# Altium PCB Transmitter.PcbDoc
Units mm, origin at the board's own origin, x right, y up, seen from the top; angles counter-clockwise.
Board outline 127.5 x 62.25 mm, 2 copper layers (Top Layer, Bottom Layer); 19 components, 30 nets, 93 pads, 4 vias.
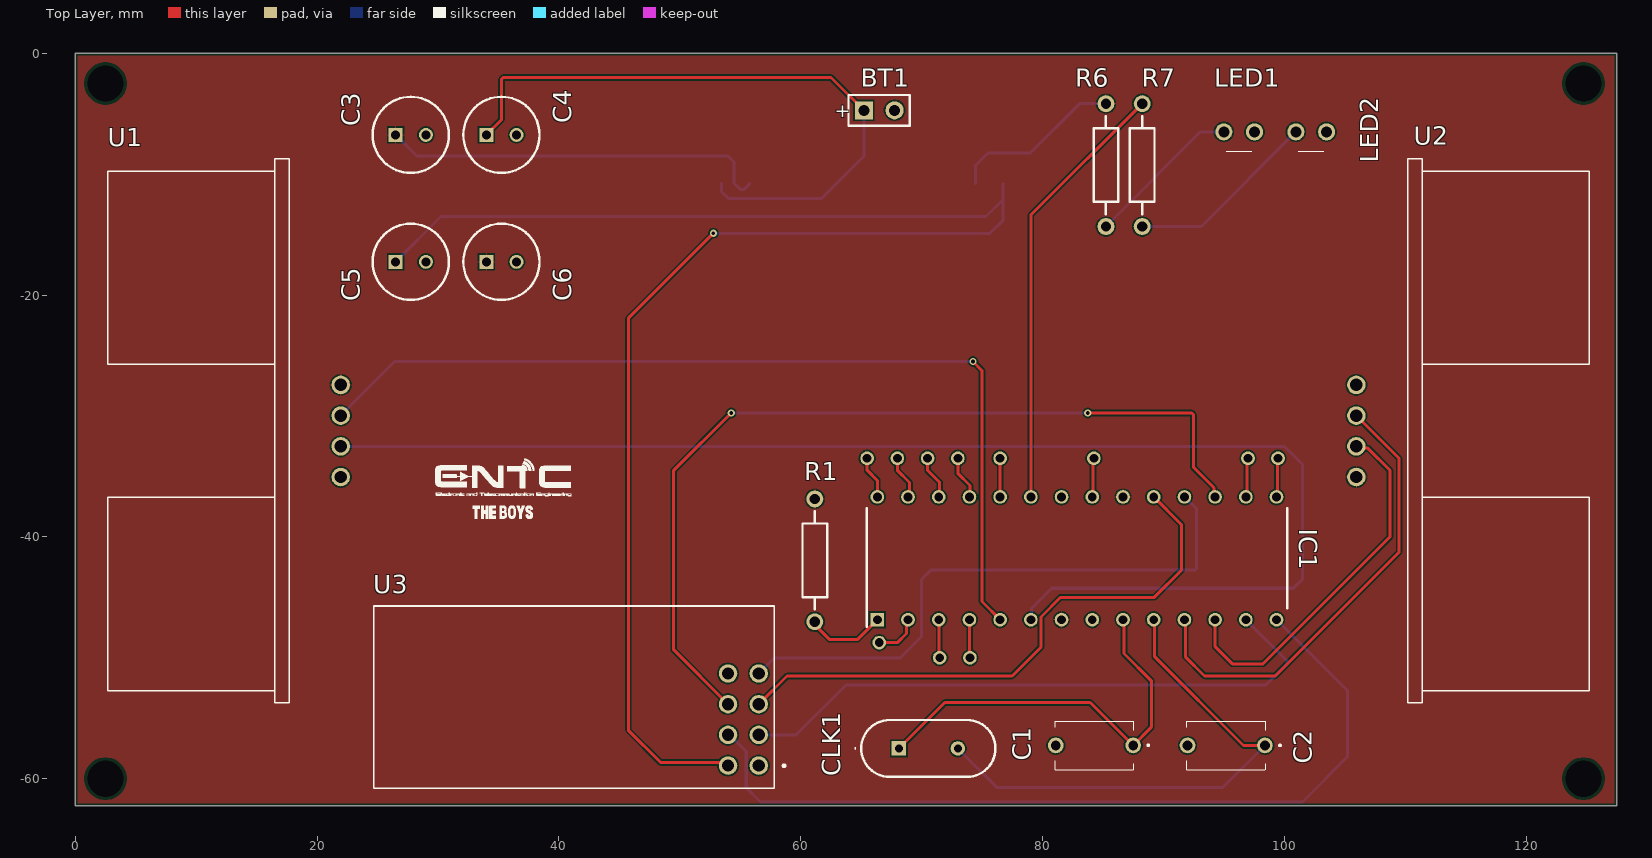
[diagram p0: Top Layer view]
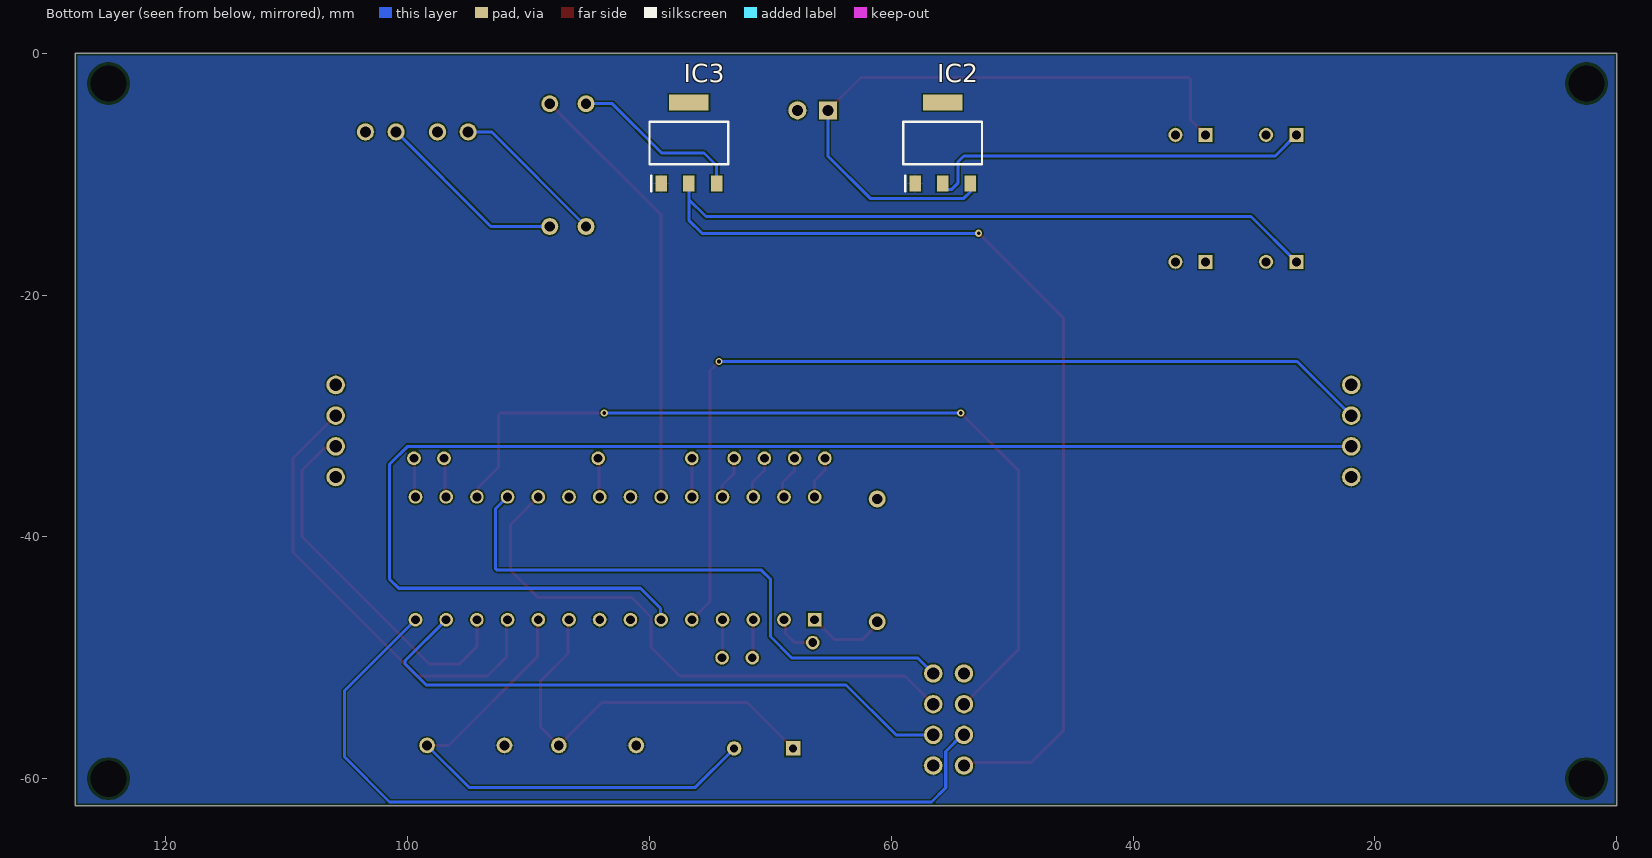
[diagram p1: Bottom Layer view, seen from below]
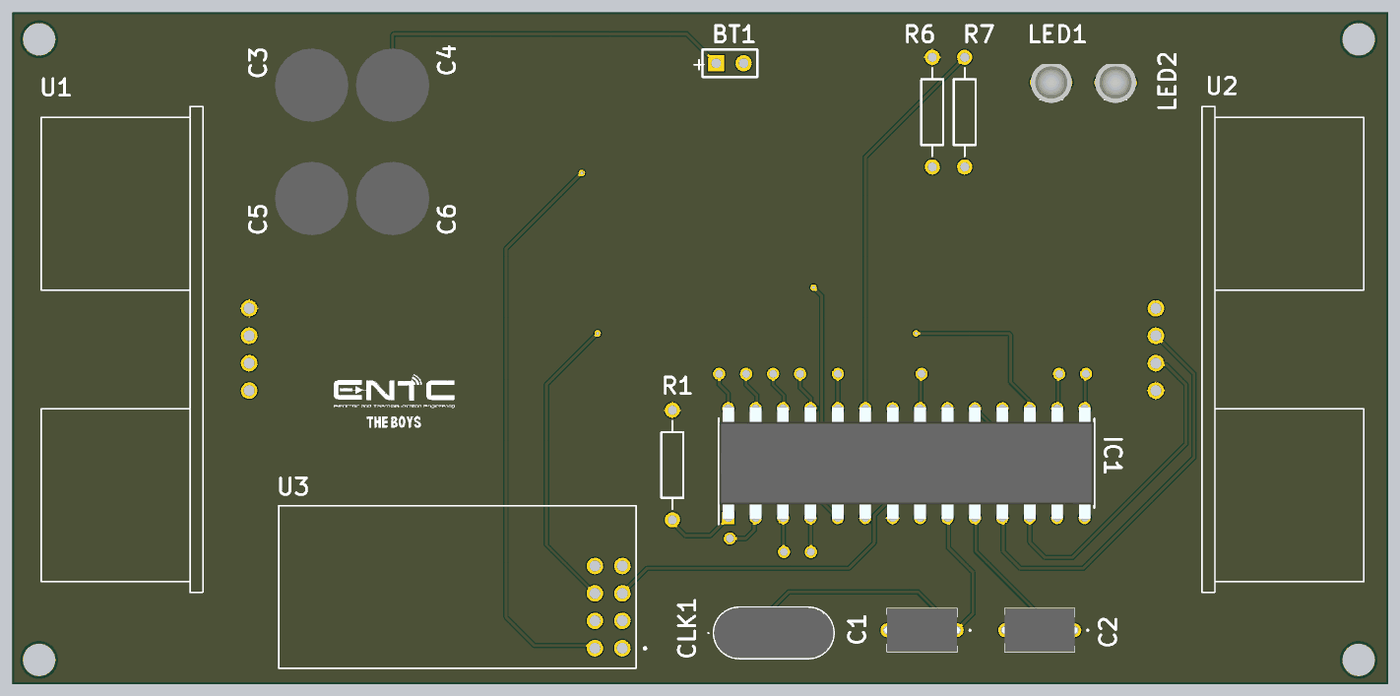
[diagram p2: 3D render of the assembled board from above, using the file's embedded part models]

## Layer stack, top to bottom
Top Solder: solder mask 0.0102, Solder Resist, Dk 3.5
Top Layer: signal copper 0.0356
Dielectric 1: dielectric 0.32, FR-4, Dk 4.8
Bottom Layer: signal copper 0.0356
Bottom Solder: solder mask 0.0102, Solder Resist, Dk 3.5

## Board outline
0,-62.25 127.5,-62.25 127.5,0 0,0

## Design rules (kind name [scope] priority, off if disabled: settings)
BoardOutlineClearance [All] p1: gap=0.2 ignorepadtopadclearanceinfootprint=FALSE
Clearance [All] p1: gap=0.127 ignorepadtopadclearanceinfootprint=FALSE except(0.25: Arc-Hole Track-Hole SMDPad-Hole THPad-Hole Via-Hole Fill-Hole Poly-Hole Region-Hole Text-Hole)
ComponentClearance [All] p1: gap=0.127 collisioncheckmode=3 verticalgap=0.127 showdistances=TRUE
DiffPairsRouting [All] p1: maxlimit=0.254 minlimit=0.127 mostfreqgap=0.127 toplayer_minwidth=0.127 toplayer_maxwidth=25.4 toplayer_prefwidth=0.127 bottomlayer_minwidth=0.127 bottomlayer_maxwidth=25.4 bottomlayer_prefwidth=0.127 maxuncoupledlength=12.7
Height [All] p1: minheight=0 maxheight=1816.048 prefheight=12.7
HoleSize [All] p1: absolutevalues=TRUE maxlimit=6.3 minlimit=0.3 maxpercent=80.000 minpercent=20.000
HoleToHoleClearance [All] p1: gap=0.25 allowstackedmicrovias=FALSE
MinimumAnnularRing [All] p1: minimumring=0.076
MinimumSolderMaskSliver [All] p1: minsoldermaskwidth=0
PlaneClearance [All] p1: clearance=0.127
PlaneConnect PlaneConnectPowerPads [InPadClass('PowerPads')] p1: planeconnectstyle=Direct reliefexpansion=0.508 reliefentries=4 reliefconductorwidth=0.254 reliefairgap=0.254
PlaneConnect [All] p2: pad.planeconnectstyle=Relief pad.reliefexpansion=0.3 pad.reliefentries=4 pad.reliefconductorwidth=0.127 pad.reliefairgap=0.127 via.planeconnectstyle=Direct via.reliefexpansion=0.3 via.reliefentries=4 via.reliefconductorwidth=0.127 via.reliefairgap=0.127
PolygonConnect PolygonConnectPowerPads [All vs (InPadClass('PowerPads'))] p1: connectstyle=Direct reliefconductorwidth=0.254 reliefentries=4 polygonreliefangle="90 Angle" airgapwidth=0.254
PolygonConnect [All] p2: thpad.connectstyle=Relief thpad.reliefconductorwidth=0.127 thpad.reliefentries=4 thpad.polygonreliefangle="90 Angle" thpad.airgapwidth=0.127 smdpad.connectstyle=Relief smdpad.reliefconductorwidth=0.127 smdpad.reliefentries=4 smdpad.polygonreliefangle="90 Angle" smdpad.airgapwidth=0.127 via.connectstyle=Direct via.reliefconductorwidth=0.127 via.reliefentries=4 via.polygonreliefangle="90 Angle" via.airgapwidth=0.127
RoutingVias [All] p1: holewidth=0.3 width=0.6 viastyle="Through Hole" minholewidth=0.3 minwidth=0.6 maxholewidth=0.6 maxwidth=6.6
SilkToSilkClearance [All] p1: silktosilkclearance=0
SilkToSolderMaskClearance [IsPad] p1: minsilkscreentomaskgap=0.127 clearancetoexposedcopper=TRUE
SolderMaskExpansion [All] p1: expansion=0.075 istentingtop=FALSE
Width [All] p1: maxlimit=25.4 minlimit=0.127 preferedwidth=0.127 minimp=50.000000 maximp=50.000000 favimp=50.000000
20 further rules are at their usual default settings.

## Components (designator, comment, footprint, x,y, rotation, side; value= is the part's Value field where it differs from the comment)
BT1 "Battery" BAT-2 66.5,-4.72 r0 top
C1 "22pF" S220K25SL0N63L6R 87.5,-57.25 r180 top
C2 "22pF" S220K25SL0N63L6R 98.4,-57.25 r180 top
C3 "22uF Electrolytic" CAPPRD250W55D630H1220 26.5,-6.75 r0 top
C4 "22uF Electrolytic" CAPPRD250W55D630H1220 34,-6.75 r0 top
C5 "22uF Electrolytic" CAPPRD250W55D630H1220 26.5,-17.25 r0 top
C6 "22uF Electrolytic" CAPPRD250W55D630H1220 34,-17.25 r0 top
CLK1 "16MHz Crystal" LFXTAL036391Bulk 68.12,-57.5 r0 top
IC1 "ATMEGA328-PU" DIP1016W53P254L3468H457Q28N 82.851,-41.774 r90 top
IC2 "AMS1117-5.0" SOT229P700X180-4N 55.75,-7.425 r90 bottom
IC3 "AMS1117-3.3" SOT229P700X180-4N 76.75,-7.425 r90 bottom
LED1 "GREEN LED" 125410SURTS530A3 95,-6.5 r0 top
LED2 "RED LED" 125410SURTS530A3 100.96,-6.5 r0 top
R1 "Res2" AXIAL-0.4 61.171,-41.944 r270 top value=10K
R6 "Res2" AXIAL-0.4 85.25,-9.25 r90 top value=330
R7 "Res2" AXIAL-0.4 88.25,-9.25 r90 top value=330
U1 "HC-SR04" XCVR_HC-SR04 21.96,-31.24 r270 top
U2 "HC-SR04" XCVR_HC-SR04 105.96,-31.24 r90 top
U3 "NRF24L01P-MODULE" XCVR_NRF24L01P-MODULE-PCB 41.25,-53.25 r180 top

## Footprints (in the part's own frame and the unit in brackets; to place one, negate y for a bottom-side part, rotate by r counter-clockwise, add the part's x,y. Pads: shape width x height; smd on the part's side, far side on the other; paste and mask are expansions set on the pad)
125410SURTS530A3 [mm]
  round 1.416 hole 0.91: 1(0,0) 2(2.54,0)
  silkscreen extent 0.2,-1.6 2.3,-1.6, body extent -0.63,-1.9 3.17,1.7, height 5.28
AXIAL-0.4 [mm] "Axial Device, Thru-Hole; 2 Leads; 0.4 in Pin Spacing"
  round 1.4 hole 0.85: 1(-5.08,0) 2(5.08,0)
  silkscreen extent -4.06,-1.02 4.06,1.02
BAT-2 [mm] "Battery; 2 Leads"
  rect 1.5x1.5 hole 0.9: 1(-1.27,0)
  round 1.5 hole 0.9: 2(1.27,0)
  silkscreen extent -2.54,-1.27 2.54,1.27
CAPPRD250W55D630H1220 [mm]
  rect 1.15x1.15 hole 0.75: 1(0,0)
  round 1.15 hole 0.75: 2(2.5,0)
  silkscreen extent -1.9,-3.15 4.4,3.15, body extent -2.15,-3.4 4.65,3.4, height 12.2
DIP1016W53P254L3468H457Q28N [mm]
  rect 1.133x1.133 hole 0.733: 1(-5.08,16.51)
  round 1.133 hole 0.733: 2(-5.08,13.97) 3(-5.08,11.43) 4(-5.08,8.89) 5(-5.08,6.35) 6(-5.08,3.81) 7(-5.08,1.27) 8(-5.08,-1.27) 9(-5.08,-3.81) 10(-5.08,-6.35) 11(-5.08,-8.89) 12(-5.08,-11.43) 13(-5.08,-13.97) 14(-5.08,-16.51) 15(5.08,-16.51) 16(5.08,-13.97) 17(5.08,-11.43) 18(5.08,-8.89) 19(5.08,-6.35) 20(5.08,-3.81) 21(5.08,-1.27) 22(5.08,1.27) 23(5.08,3.81) 24(5.08,6.35) 25(5.08,8.89) 26(5.08,11.43) 27(5.08,13.97) 28(5.08,16.51)
  silkscreen extent -5.65,-17.4 4.13,17.4, body extent -5.21,-17.34 5.21,17.34, height 4.57
LFXTAL036391Bulk [mm]
  rect 1.192x1.192 hole 0.65: 1(0,0)
  round 1.192 hole 0.65: 2(4.88,0)
  silkscreen extent -3.66,-2.35 7.99,2.35, body extent -3.11,-2.35 7.99,2.35, height 4.2
S220K25SL0N63L6R [mm]
  round 1.3 hole 0.8: 1(0,0) 2(6.4,0)
  silkscreen extent -1.3,-2 6.45,2, body extent -0.3,-2 6.7,2, height 6.6
SOT229P700X180-4N [mm]
  rect 1.3x0.95 smd: 1(-3.35,2.29) 2(-3.35,0) 3(-3.35,-2.29)
  rect 1.3x3.25 smd: 4(3.35,0)
  silkscreen extent -4,-3.25 1.75,3.25, body extent -3.5,-3.25 3.5,3.25, height 1.8
XCVR_HC-SR04 [mm]
  round 1.53 hole 1.02: 1(-3.81,0) 2(-1.27,0) 3(1.27,0) 4(3.81,0)
  silkscreen extent -22.5,-19.27 22.5,-4.27
XCVR_NRF24L01P-MODULE-PCB [mil]
  round 60 hole 40: 1(-601.75,223.19) 2(-501.75,223.19) 3(-601.75,123.19) 4(-501.75,123.19) 5(-601.75,23.19) 6(-501.75,23.19) 7(-601.75,-76.81) 8(-501.75,-76.81)
  silkscreen extent -688,-297 652,296

## Part data
BT1: "Multicell Battery", LatestRevisionDate=17-Jul-2002, LatestRevisionNote="Re-released for DXP Platform.", PackageDescription="Battery; 2 Leads", PackageReference=BAT-2, Published=24-Mar-1999, Publisher="Altium Limited"
C1 C2: library part S220K25SL0N63L6R, "Capacitor Ceramic THT", Manufacturer_Name=Vishay, Mouser Part Number=594-S220K25SL0N63L6R, Arrow Part Number=S220K25SL0N63L6R, Arrow Price/Stock=https://www.arrow.com/en/products/s220k25sl0n63l6r/vishay?region=nac, Datasheet Link=http://www.vishay.com/docs/28515/sseries.pdf, Height=6.5mm, Manufacturer_Part_Number=S220K25SL0N63L6R, Mouser Price/Stock=https://www.mouser.co.uk/ProductDetail/Vishay-BC-Components/S220K25SL0N63L6R?qs=a%252BZougrH3ehuV7s4gtTaOA%3D%3D
C3 C4 C5 C6: library part ECA1EEN220, "Capacitor Polarised", Manufacturer_Name=Panasonic, Datasheet Link=http://industrial.panasonic.com/cdbs/www-data/pdf/RDF0000/ABA0000C1044.pdf, Height=12.2mm, Manufacturer_Part_Number=ECA1EEN220
CLK1: library part LFXTAL036391Bulk, "Crystal or Oscillator", Manufacturer_Name=IQD, Mouser Part Number=449-LFXTAL036391BULK, Datasheet Link=https://componentsearchengine.com/Datasheets/1/LFXTAL036391Bulk.pdf, Height=4.1mm, Manufacturer_Part_Number=LFXTAL036391Bulk, Mouser Price/Stock=https://www.mouser.co.uk/ProductDetail/IQD/LFXTAL036391Bulk?qs=e4%2FAndAAwgLVSm%2FKWOsYLg%3D%3D
IC1: "Integrated Circuit", Manufacturer_Name=Microchip, Mouser Part Number=556-ATMEGA328-PU, Arrow Part Number=ATMEGA328-PU, Arrow Price/Stock=https://www.arrow.com/en/products/atmega328-pu/microchip-technology?region=nac, Datasheet Link=https://componentsearchengine.com/Datasheets/1/ATMEGA328-PU.pdf, Height=4.572mm, Manufacturer_Part_Number=ATMEGA328-PU, Mouser Price/Stock=https://www.mouser.co.uk/ProductDetail/Microchip-Technology/ATMEGA328-PU?qs=lwdSMh1%2FoYJT8tfItQpQtA%3D%3D
IC2 IC3: "Integrated Circuit", Manufacturer_Name="Advanced Monolithic Systems", Datasheet Link=http://www.advanced-monolithic.com/pdf/ds1117.pdf, Height=1.8mm
  IC2: Manufacturer_Part_Number=AMS1117-5.0
  IC3: Manufacturer_Part_Number=AMS1117-3.3
LED1 LED2: library part 1254-10SURT_S530-A3, "LED", Arrow Part Number=1254-10SURT/S530-A3, Manufacturer_Name=Everlight, Arrow Price/Stock=https://www.arrow.com/en/products/1254-10surts530-a3/everlight-electronics?region=nac, Datasheet Link=https://datasheet.datasheetarchive.com/originals/distributors/Datasheets-3/DSA-55877.pdf, Height=5.2mm, Manufacturer_Part_Number=1254-10SURT/S530-A3
R1 R6 R7: "Resistor", LatestRevisionDate=17-Jul-2002, LatestRevisionNote="Re-released for DXP Platform.", PackageDescription="Axial Device, Thru-Hole; 2 Leads; 0.4 in Pin Spacing", PackageReference=AXIAL-0.4, Published=8-Jun-2000, Publisher="Altium Limited"
U1 U2: "Ultrasonic Sensor Module", Package=None, Availability=Unavailable, MP=HC-SR04, Price=None
U3: library part NRF24L01P-MODULE-PCB, "- Transceiver For Use With nRF24L01+", Package=None, Availability=Bad, MF="Nordic Semiconductor", Mouser-Purchase-URL=https://snapeda.com/shop?store=Mouser&id=230534, MP=NRF24L01P-MODULE-PCB, Price=None, SnapEDA_Link=https://www.snapeda.com/parts/NRF24L01P-MODULE-PCB/Nordic%20Semiconductor%20ASA/view-part/230534/?ref=snap

## Free pads (board coordinates)
  rect 1.524x1.524 hole 3: 6(2.5,-60) 6(2.5,-2.5) 6(124.75,-60) 6(124.75,-2.5)
  round 1.133 hole 0.733: 14(99.484,-33.5) 15(97,-33.5) 16(84.25,-33.5) 19(76.5,-33.5) 20(73,-33.5) 25(70.5,-33.5) 26(65.5,-33.5) 27(68,-33.5) 28(74,-50) 29(71.5,-50) 31(66.5,-48.75)

## Via types
v1: diameter 0.6, hole 0.3, Top Layer to Bottom Layer, 4 vias

## Nets (pads, with @x,y where several pads share a name; then routed paths per layer and width w, separated by ;. In a path a pad name is that pad's centre, name@x,y a point inside that pad or via, vN(x,y) a via of type N, cw(c..) or ccw(c..) an arc to the next point about the centre after c; other vN are vias at no path point)
2: IC1.2 pad.31 | length 3.8
  Top Layer w0.25: pad.31 68,-48.75 68.75,-48 68.75,-46.985 IC1.2
3: IC1.3 pad.29 | length 3.2
  Top Layer w0.25: IC1.3 71.461,-46.893 71.461,-49.961 pad.29
3.3V: C5.1 IC3.2 U3.2 | length 133
  Top Layer w0.25: v1(52.781,-14.891) 45.75,-21.922 45.75,-56 48.419,-58.669 U3.2@53.744,-58.669
  Bottom Layer w0.25: C5.1 30.25,-13.5 75.338,-13.5 76.75,-12.088 ; v1(52.781,-14.891) 75.666,-14.891 76.75,-13.807 76.75,-12.088 ; IC3.2 76.75,-12.088
4: IC1.4 pad.28 | length 3.2
  Top Layer w0.25: IC1.4 73.981,-46.873 73.981,-49.981 pad.28
5V: C3.1 C6.1 IC1.7 IC1.20 IC2.2 IC3.3 R1.1 R6.2 U1.1 U2.1 | length 46.8
  Bottom Layer w0.25: C3.1 28.25,-8.5 54,-8.5 54.5,-9 54.5,-10.75 55,-11.25 55.339,-11.25 55.75,-10.839 IC2.2 ; IC3.3 74.46,-9.29 75.5,-8.25 79,-8.25 83.08,-4.17 R6.2
15: IC1.15 pad.14 | length 3.2
  Top Layer w0.25: IC1.15 99.423,-36.632 99.423,-33.562 pad.14
16: IC1.16 pad.15 | length 3.3
  Top Layer w0.25: IC1.16 96.911,-36.604 96.911,-33.589 pad.15
21: IC1.21 pad.16 | length 3.2
  Top Layer w0.25: IC1.21 84.186,-36.629 84.186,-33.564 pad.16
24: IC1.24 pad.19 | length 3.2
  Top Layer w0.25: IC1.24@76.501,-36.693 pad.19
25: IC1.25 pad.20 | length 3.6
  Top Layer w0.25: pad.20 73,-34.75 74,-35.75 74,-36.655 IC1.25
26: IC1.26 pad.25 | length 3.6
  Top Layer w0.25: pad.25 70.5,-34.5 71.5,-35.5 71.5,-36.615 IC1.26
27: IC1.27 pad.27 | length 3.7
  Top Layer w0.25: pad.27 68,-34.5 69,-35.5 69,-36.575 IC1.27
28: IC1.28 pad.26 | length 3.5
  Top Layer w0.25: pad.26 65.5,-34.5 66.341,-35.341 IC1.28
CE: IC1.13 U3.3 | length 51.2
  Bottom Layer w0.25: U3.3 59.621,-56.379 63.75,-52.25 98.475,-52.25 100.243,-50.482 100.243,-50.275 IC1.13
CLK_1: C1.1 CLK1.1 IC1.9 | length 34.4
  Top Layer w0.25: CLK1.1 71.926,-53.694 83.944,-53.694 C1.1 89.007,-55.743 89.007,-51.902 86.75,-49.645 86.75,-46.942 IC1.9
CLK_2: C2.1 CLK1.2 IC1.10 | length 43.4
  Top Layer w0.25: IC1.10 89.28,-46.932 89.28,-49.91 96.62,-57.25 C2.1
  Bottom Layer w0.25: CLK1.2 76.25,-60.75 94.9,-60.75 C2.1
CSN: IC1.14 U3.4 | length 70.6
  Bottom Layer w0.25: U3.4 54.129,-56.379 55.5,-57.75 55.5,-60.75 56.675,-61.925 101.5,-61.925 105.25,-58.175 105.25,-52.742 IC1.14
ECHO_1: IC1.6 U1.3 | length 114
  Bottom Layer w0.25: U1.3 100.01,-32.51 101.5,-34 101.5,-43.5 100.75,-44.25 80.75,-44.25 79.088,-45.912 79.088,-46.807 IC1.6
ECHO_2: IC1.11 U2.3 | length 38.4
  Top Layer w0.25: IC1.11 91.82,-46.932 91.82,-49.91 93.41,-51.5 99.25,-51.5 109.5,-41.25 109.5,-33.51 U2.3
GND: BT1.2 C1.2 C2.2 C3.2 C4.2 C5.2 C6.2 IC1.8 IC1.22 IC2.1 IC3.1 LED1.2 LED2.2 U1.4 U2.4 U3.1
MISO: IC1.18 U3.7 | length 48.9
  Bottom Layer w0.25: U3.7 57.833,-50 68.25,-50 70,-48.25 70,-43.5 70.75,-42.75 92.604,-42.75 92.75,-42.604 92.75,-37.702 IC1.18
MOSI: IC1.17 U3.6 | length 73.8
  Top Layer w0.25: U3.6 49.5,-49.344 49.5,-34.5 v1(54.25,-29.75) ; v1(83.75,-29.75) 92.354,-29.75 92.5,-29.896 92.5,-34.25 94.197,-35.947 94.197,-36.609 IC1.17
  Bottom Layer w0.25: v1(54.25,-29.75) v1(83.75,-29.75)
NetIC1_1: IC1.1 R1.2 | length 6.6
  Top Layer w0.25: R1.2 61.171,-47.28 62.364,-48.473 64.722,-48.473 IC1.1
NetLED1_1: LED1.1 R6.1 | length 13
  Bottom Layer w0.25: R6.1 93.08,-6.5 LED1.1
NetLED2_1: LED2.1 R7.1 | length 16
  Bottom Layer w0.25: R7.1 93.13,-14.33 LED2.1
"RED LED": IC1.23 R7.2 | length 36.3
  Top Layer w0.25: IC1.23 79.041,-13.379 R7.2
SCK: IC1.19 U3.5 | length 48
  Top Layer w0.25: U3.5 58.873,-51.5 77.5,-51.5 79.875,-49.125 79.875,-46.625 81.5,-45 89.25,-45 91.5,-42.75 91.5,-38.992 IC1.19
TRIG_1: IC1.5 U1.2 | length 76.4
  Top Layer w0.25: v1(74.25,-25.5) 75,-26.25 75,-45.352 IC1.5
  Bottom Layer w0.25: U1.2 26.43,-25.5 v1(74.25,-25.5)
TRIG_2: IC1.12 U2.2 | length 30.7
  Top Layer w0.25: IC1.12 94.281,-49.08 95.702,-50.5 98.25,-50.5 108.75,-40 108.75,-34.5 106.916,-32.666 106.116,-32.666 U2.2
VCC: BT1.1 C4.1 IC2.3 | length 54.2
  Top Layer w0.25: C4.1 35.25,-5.5 35.25,-2.146 35.396,-2 62.51,-2 BT1.1 BT1.1@65.25,-4.74
  Bottom Layer w0.25: IC2.3 53.46,-11.46 54,-12 61.75,-12 65.25,-8.5 BT1.1@65.25,-4.74
pads on no net: IC2.4 IC3.4 U3.8

## Polygon pours and split planes (outlines as drawn)
5V on Top Layer "5V_L01_P000" (solid, remove dead copper, pour order 0): 0,0 127.5,0 127.5,-62.25 0,-62.25
GND on Bottom Layer "GND_L02_P001" (solid, remove dead copper, pour order 1): 0,0 127.5,0 127.5,-62.25 0,-62.25

## Silkscreen, mask and mechanical layers (free items; w line width, h text height)
Top Overlay:
  drawing of 57 lines, arcs and shapes, not listed

## Text inside footprints (layer, text, board x,y; h text height)
BT1: Top Overlay "+" at 62.83,-5.297 h1.15